# EAGLE board litebrite2.1 (EAGLE 6.5.0)
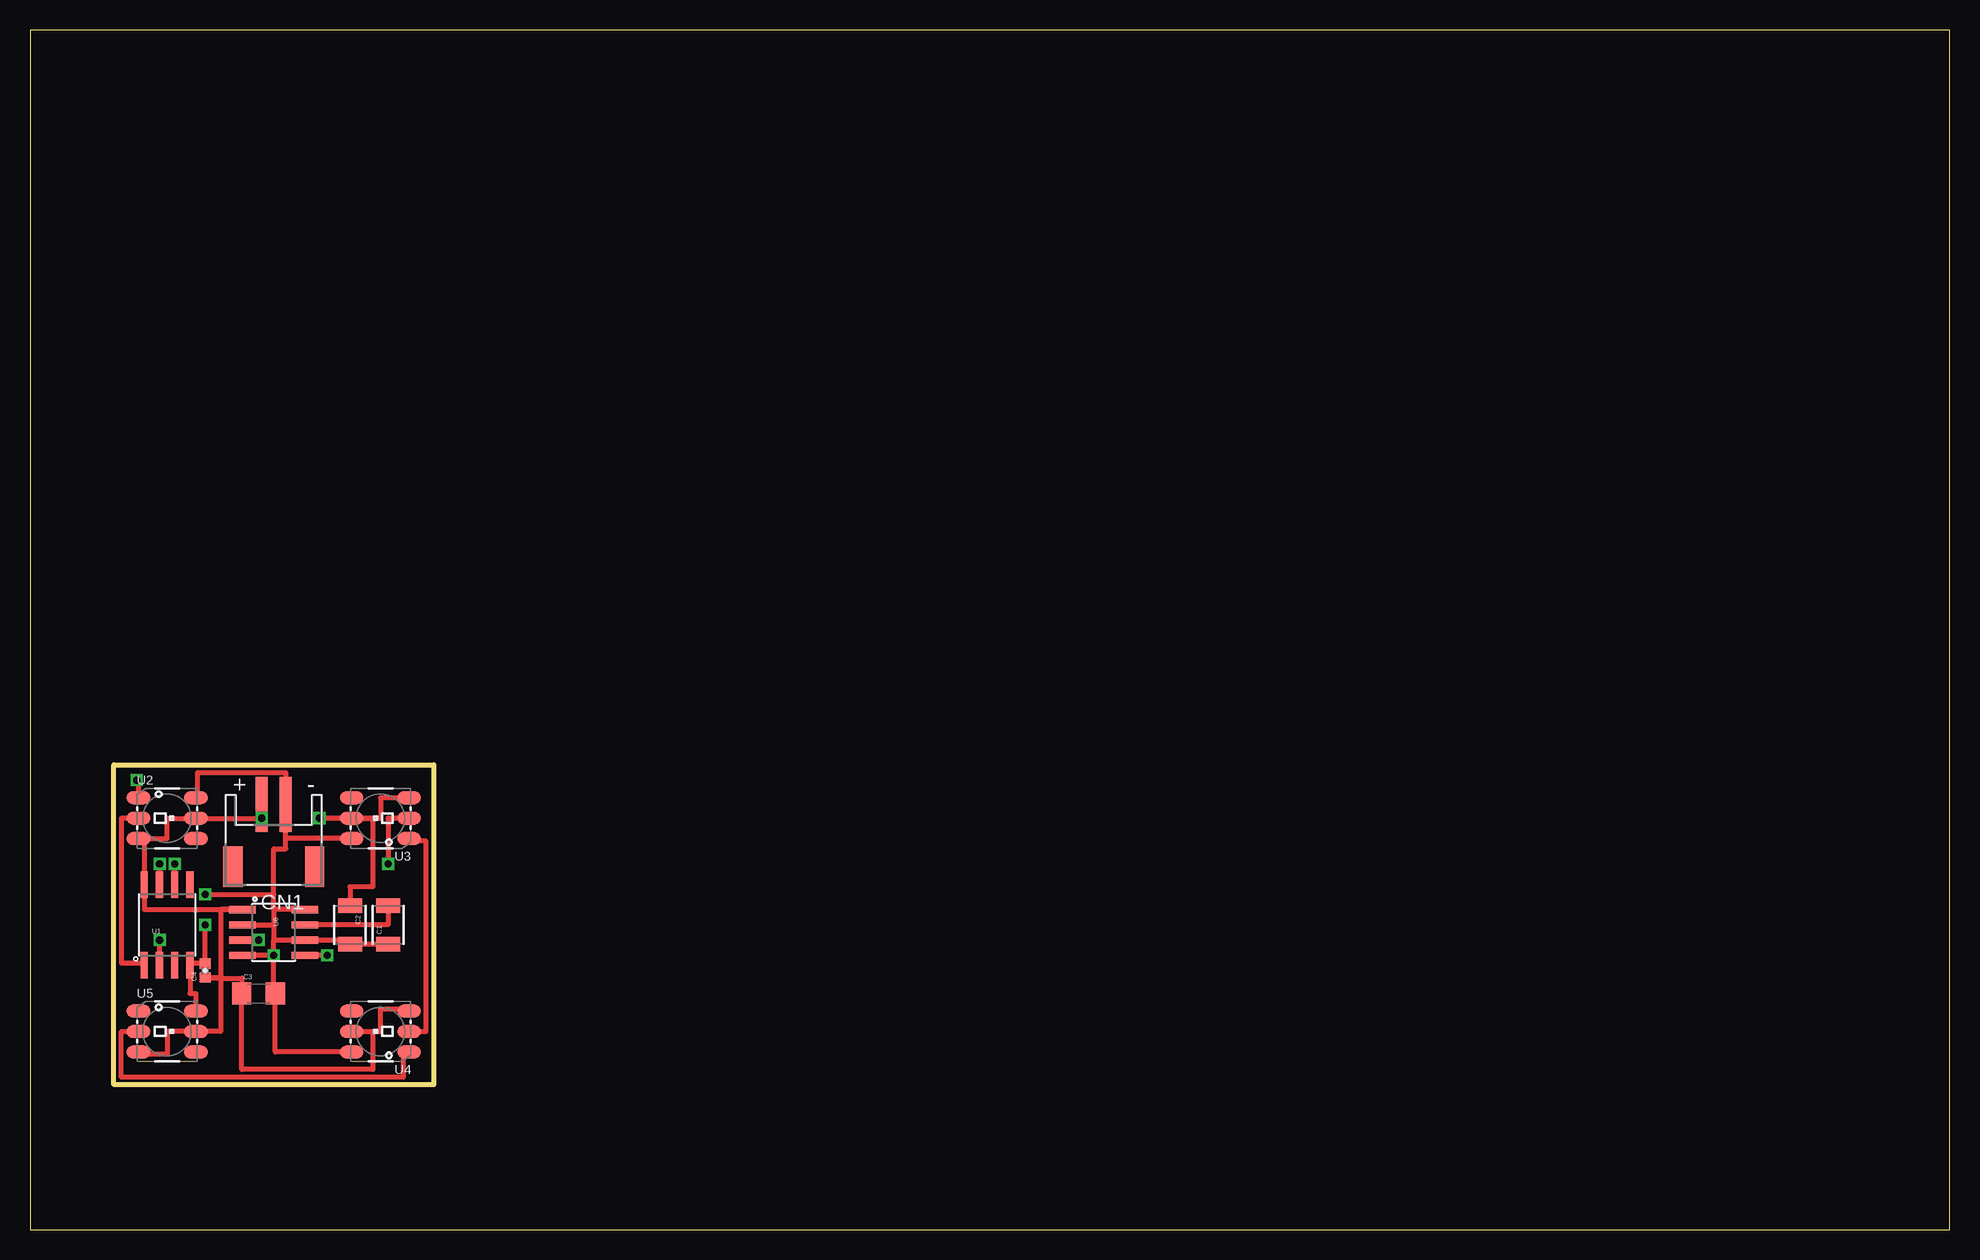
[diagram p0: board, top side]
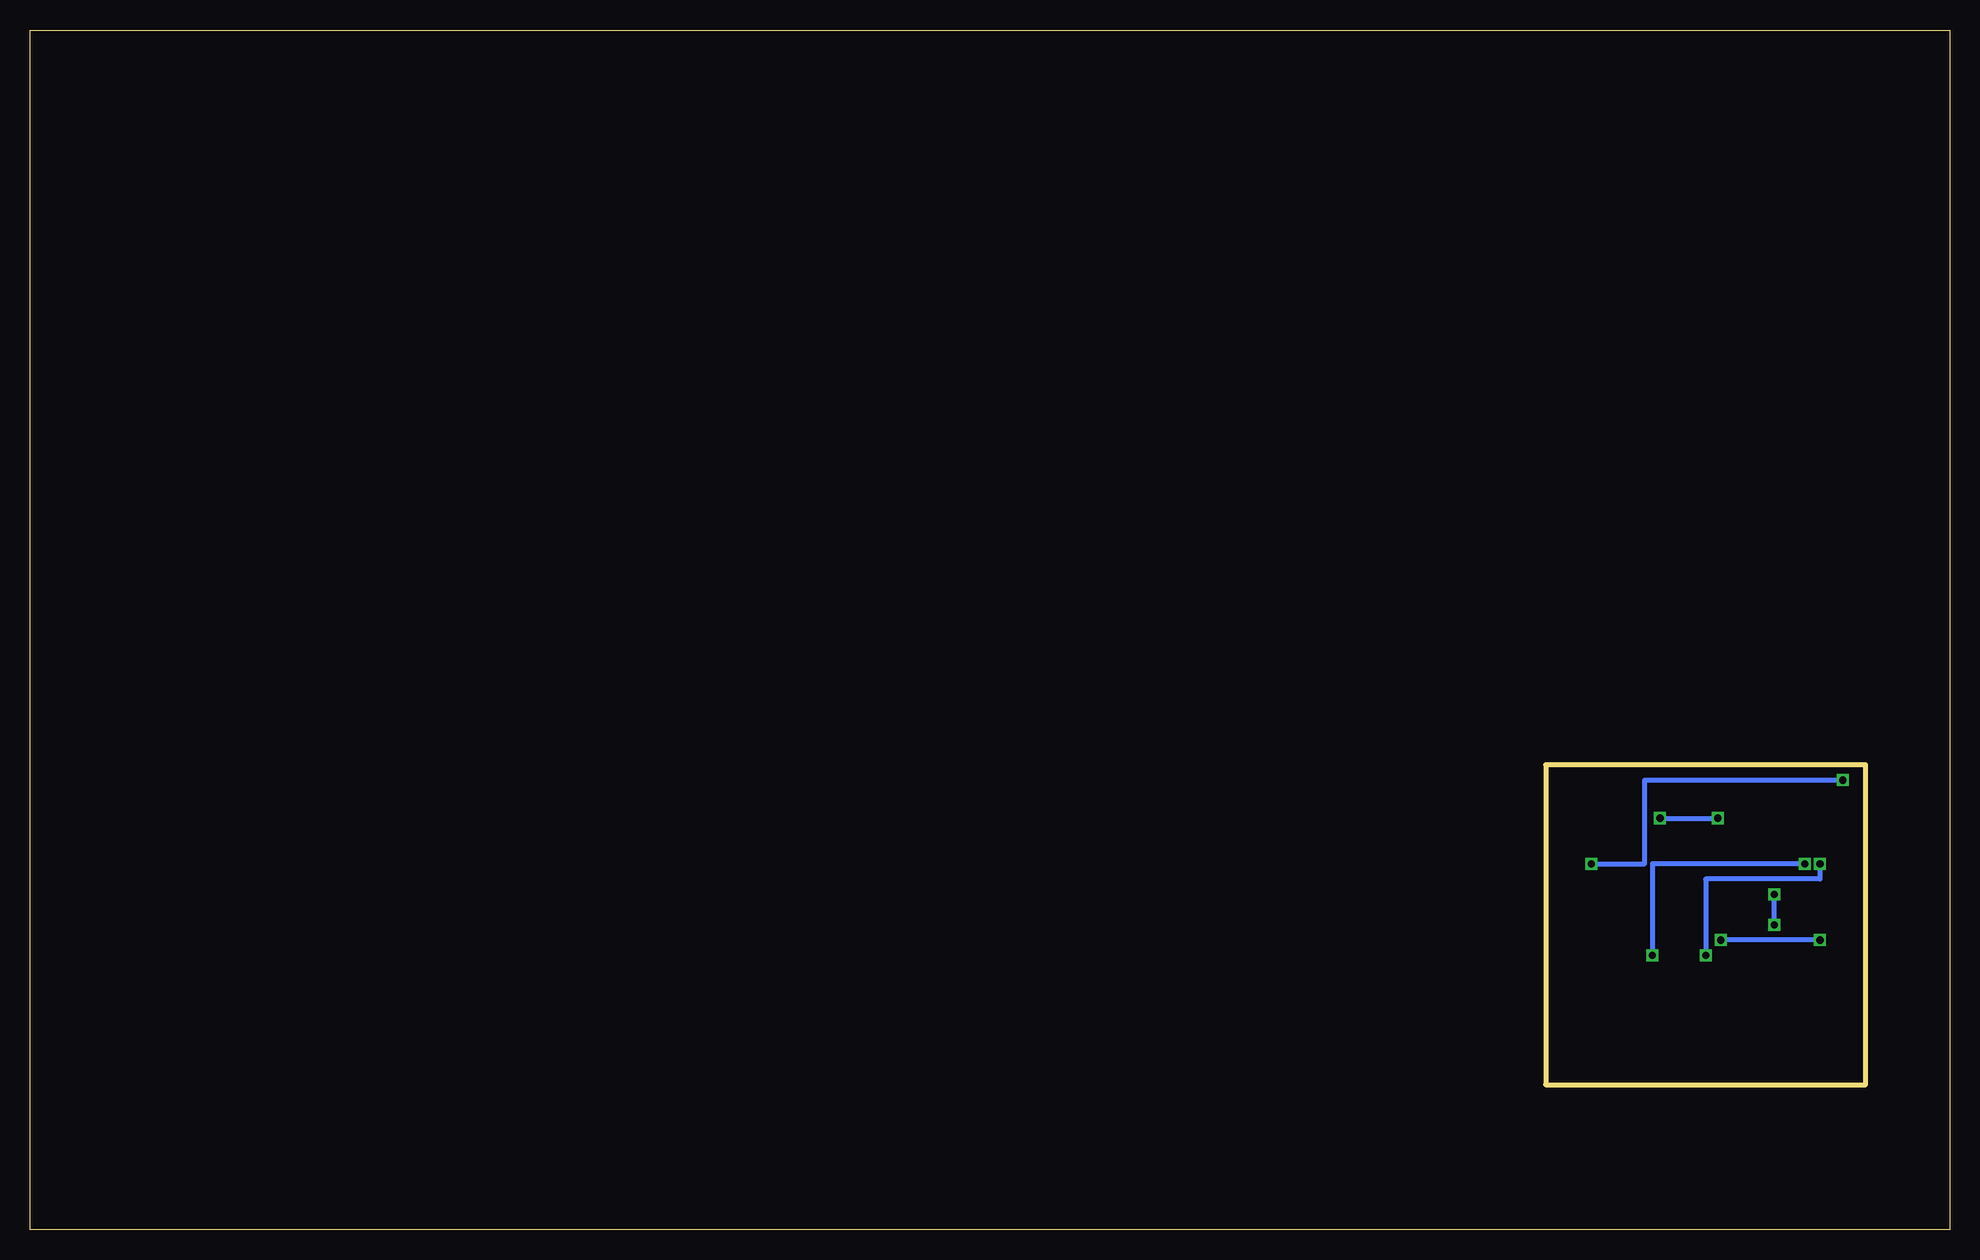
[diagram p1: board, bottom side, seen from below]

Size 160 x 100 mm. Coordinates in mm from the lower left corner, seen from the top.
Outline: 0,0 160,0 160,100 0,100 0,0
Outline: 6.99,38.73 33.66,38.73 33.66,12.06 6.99,12.06 6.99,38.73
Copper layers (1*16): Top 0.035mm / dielectric 1.5mm / Bottom 0.035mm
Design rules "default": minimum track width 10mil, minimum drill 24mil, track to track 8mil, track to pad 8mil, pad to pad 8mil, via to via 8mil, smd to smd 8mil, copper to edge 40mil, drill to drill 8mil, minimum pad ring 10mil, minimum via ring 8mil, stop-mask expansion 4mil, vias tented up to drill 0mil, thermal gap 10mil

## Footprints (pad centres in the part's own frame; a part is rotated, then mirrored left to right if it is on the bottom)
1210 = smd 1.2 x 2: 1 -1.6,0; 2 1.6,0
1206 = smd 1.6 x 1.8: 1 -1.4,0; 2 1.4,0
0402-CAP = smd 0.85 x 0.9: 1 -0.58,0; 2 0.58,0
JST-PH-2-SMT-RA = smd 1 x 4.6: 1 1,-3.7; 2 -1,-3.7 | smd 1.6 x 3.4: NC1 -3.4,1.5; NC2 3.4,1.5
SO08-EIAJ = smd 0.61 x 2.21: 1 -1.905,-3.378; 2 -0.635,-3.378; 3 0.635,-3.378; 4 1.905,-3.378; 5 1.905,3.353; 6 0.635,3.353; 7 -0.635,3.353; 8 -1.905,3.353
LED-TRICOLOR-5050-IC = smd 2 x 1.1: 1 -2.4,1.7; 2 -2.4,0; 3 -2.4,-1.7; 4 2.4,-1.7; 5 2.4,0; 6 2.4,1.7
SO08 = smd 0.61 x 2.21: 1 -1.905,-2.616; 2 -0.635,-2.616; 3 0.635,-2.616; 4 1.905,-2.616; 5 1.905,2.616; 6 0.635,2.616; 7 -0.635,2.616; 8 -1.905,2.616

## Placement (x,y rotation side)
C1  100uF  [1210]  29.84,25.4 90 top
C2  100uF  [1210]  26.67,25.4 270 top
C3  10uF  [1206]  19.05,19.68 0 top
C4  0.1uF  [0402-CAP]  14.61,21.59 90 top
CN1  [JST-PH-2-SMT-RA]  20.32,31.75 180 top
FRAME1  FRAME-LETTERNO_PACKAGE  [DUMMY]  -13.97,31.75 0 top  (outside the outline)
U1  Tiny45-20-SMT  [SO08-EIAJ]  11.43,25.4 0 top
U2  WS2811  [LED-TRICOLOR-5050-IC]  11.43,34.29 0 top
U3  WS2811  [LED-TRICOLOR-5050-IC]  29.21,34.29 180 top
U4  WS2811  [LED-TRICOLOR-5050-IC]  29.21,16.51 180 top
U5  WS2811  [LED-TRICOLOR-5050-IC]  11.43,16.51 0 top
U6  MLX90316  [SO08]  20.32,24.77 270 top

## Library data of the parts
C1 C2 = SparkFun-Capacitors; PROD_ID: CAP-09827
C3 = SparkFun-Capacitors; PROD_ID: CAP-10057
C4 = SparkFun-Capacitors; PROD_ID: CAP-12416
CN1 = adafruit
FRAME1 = SparkFun-Aesthetics; DESIGNER: Nobody; VERSION: v01
U1 = SparkFun-DigitalIC; PROD_ID: IC-08922
U2-U5 = SparkFun-LED; PROD_ID: DIO-11598
U6 = SparkFun-AnalogIC; PROD_ID: IC-10141

## Nets
5V: C2.1 C3.1 C4.1 CN1.1 U1.8 U2.3 U2.5 U3.3 U3.5 U4.3 U4.5 U5.3 U5.5 U6.1
GND: C1.1 C2.2 C3.2 C4.2 CN1.2 U1.4 U2.6 U3.6 U4.6 U5.6 U6.2 U6.6 U6.8
N$1: U2.1 U3.2
N$2: U3.1 U4.2
N$3: U4.1 U5.2
N$4: U1.1 U2.2
N$5: C1.2 U6.7
N$6: U1.6 U6.5
N$7: U1.7 U6.4
N$8: U1.2 U6.3

## Tracks (layer width: path | path; a pad name or v marks a point on that pad's centre or on a via)
5V  (via drill 0.6)
  Top 0.406: U2.3 9.53,32.59 | 9.53,32.59 U1.8 9.53,26.67 U6.1 | 9.53,32.59 11.43,32.59 11.43,34.29 U2.5 19.05,34.29 v19.32,34.29 CN1.1 | U6.1 17.78,26.67 | U6.1 15.88,26.67 15.88,21.01 | 15.88,20.95 14.61,20.95 C4.1 15.88,21.01 | 15.88,21.01 15.88,20.95 | 15.88,20.95 15.88,16.51 U5.5 11.43,16.51 11.43,14.61 9.03,14.61 U5.3 | U4.5 28.57,16.51 | 28.57,16.51 28.57,13.34 17.65,13.34 C3.1 17.65,20.95 15.88,20.95 | 28.57,16.51 29.21,16.51 29.21,18.41 31.61,18.41 U4.3 | U3.3 29.21,35.99 29.21,34.29 U3.5 | U3.5 28.57,34.29 28.57,28.57 26.67,28.57 C2.1 | U3.5 v24.13,34.29
  Bottom 0.406: v24.13,34.29 v19.32,34.29
GND  (via drill 0.6)
  Top 0.406: U5.6 13.83,19.68 13.34,19.68 U1.4 13.34,22.17 C4.2 v14.61,25.4 | 20.32,24.13 20.32,19.68 C3.2 20.45,14.81 U4.6 | 20.32,24.13 U6.6 26.67,24.13 C2.2 C1.1 | U6.2 20.32,25.4 | 20.32,25.4 20.32,24.13 | 20.32,26.67 20.32,25.4 | U6.8 20.32,26.67 | 20.32,26.67 20.32,27.94 | 20.32,27.94 20.32,31.75 21.32,31.75 21.32,32.59 | 21.32,32.59 CN1.2 21.32,38.1 13.97,38.1 13.97,35.99 U2.6 | U3.6 21.32,32.59 | v14.61,27.94 20.32,27.94
  Bottom 0.406: v14.61,25.4 v14.61,27.94
N$1  (via drill 0.6)
  Top 0.406: U3.2 29.84,34.29 v29.84,30.48 | v8.89,37.47 9.03,37.47 U2.1
  Bottom 0.406: v29.84,30.48 25.4,30.48 25.4,37.47 v8.89,37.47
N$2
  Top 0.406: U4.2 33.02,16.51 33.02,32.38 31.61,32.38 U3.1
N$3
  Top 0.406: U4.1 31.11,14.81 31.11,12.7 7.62,12.7 7.62,16.51 U5.2
N$4
  Top 0.406: U2.2 7.62,34.29 7.62,22.23 9.53,22.23 U1.1
N$5
  Top 0.406: C1.2 29.84,25.4 U6.7
N$6  (via drill 0.6)
  Top 0.406: U1.6 v12.06,30.48 | v24.77,22.86 U6.5
  Bottom 0.406: v12.06,30.48 24.77,30.48 v24.77,22.86
N$7  (via drill 0.6)
  Top 0.406: U1.7 v10.79,30.48 | v20.32,22.86 U6.4
  Bottom 0.406: v10.79,30.48 10.79,29.21 20.32,29.21 v20.32,22.86
N$8  (via drill 0.6)
  Top 0.406: U1.2 v10.79,24.13 | v19.05,24.13 U6.3
  Bottom 0.406: v10.79,24.13 v19.05,24.13